# Altium PCB Brushless_driver_FOC_AbsoluteEncoder_V2.PcbDoc
Units mil, origin at the board's own origin, x right, y up, seen from the top; angles counter-clockwise.
Board outline 3750 x 1875 mil, 2 copper layers (Top Layer, Bottom Layer); 99 components, 79 nets, 371 pads, 291 vias.
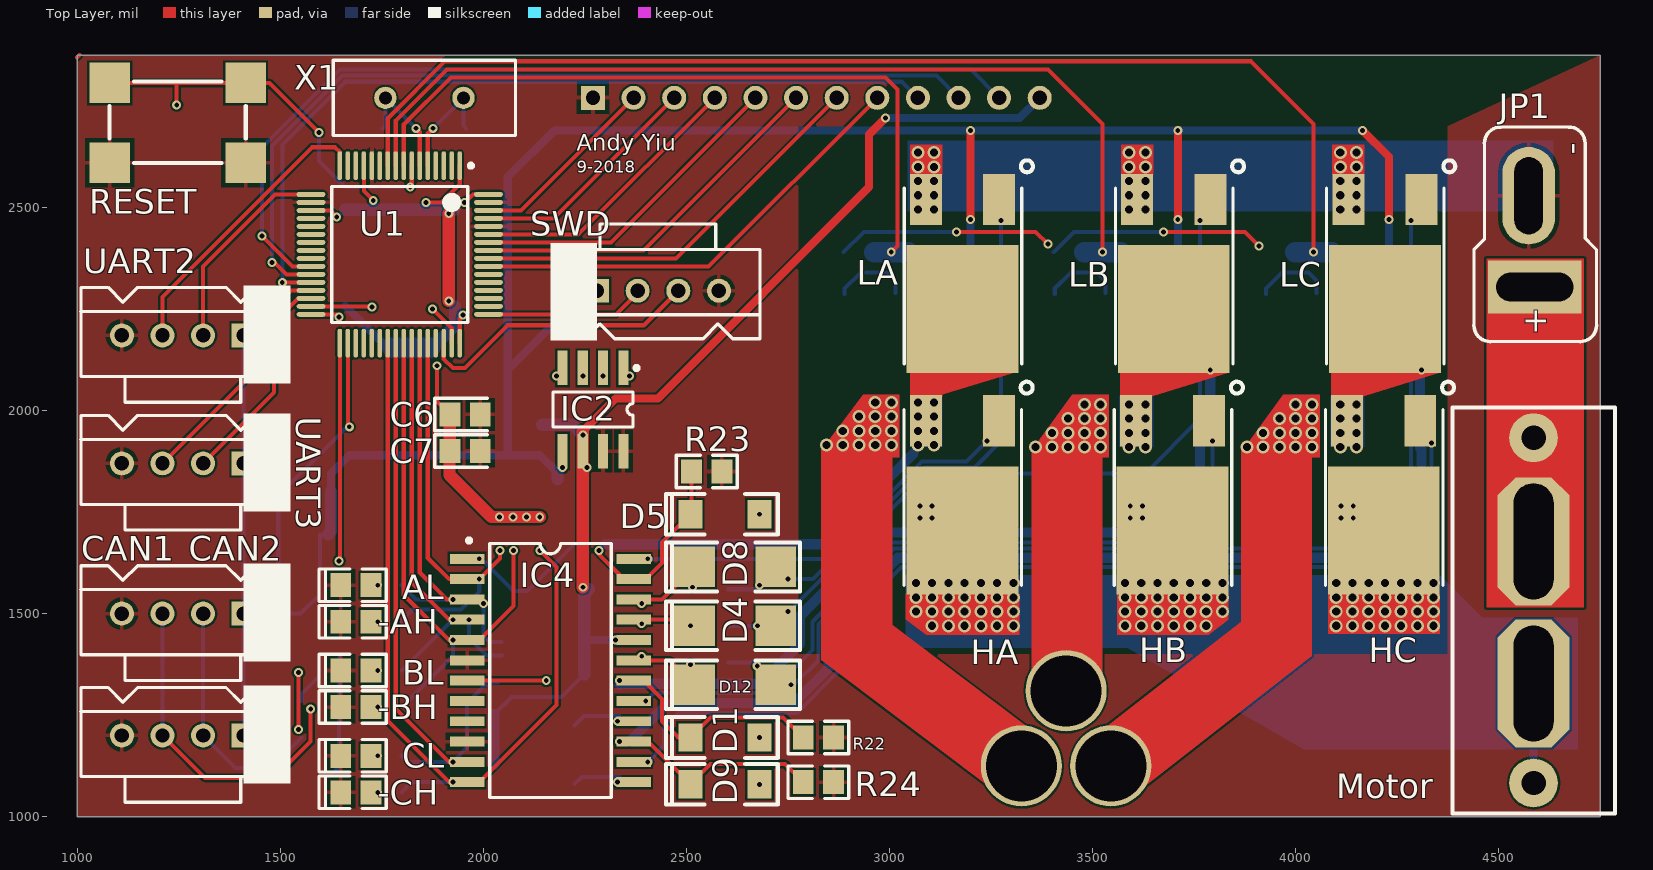
[diagram p0: Top Layer view]
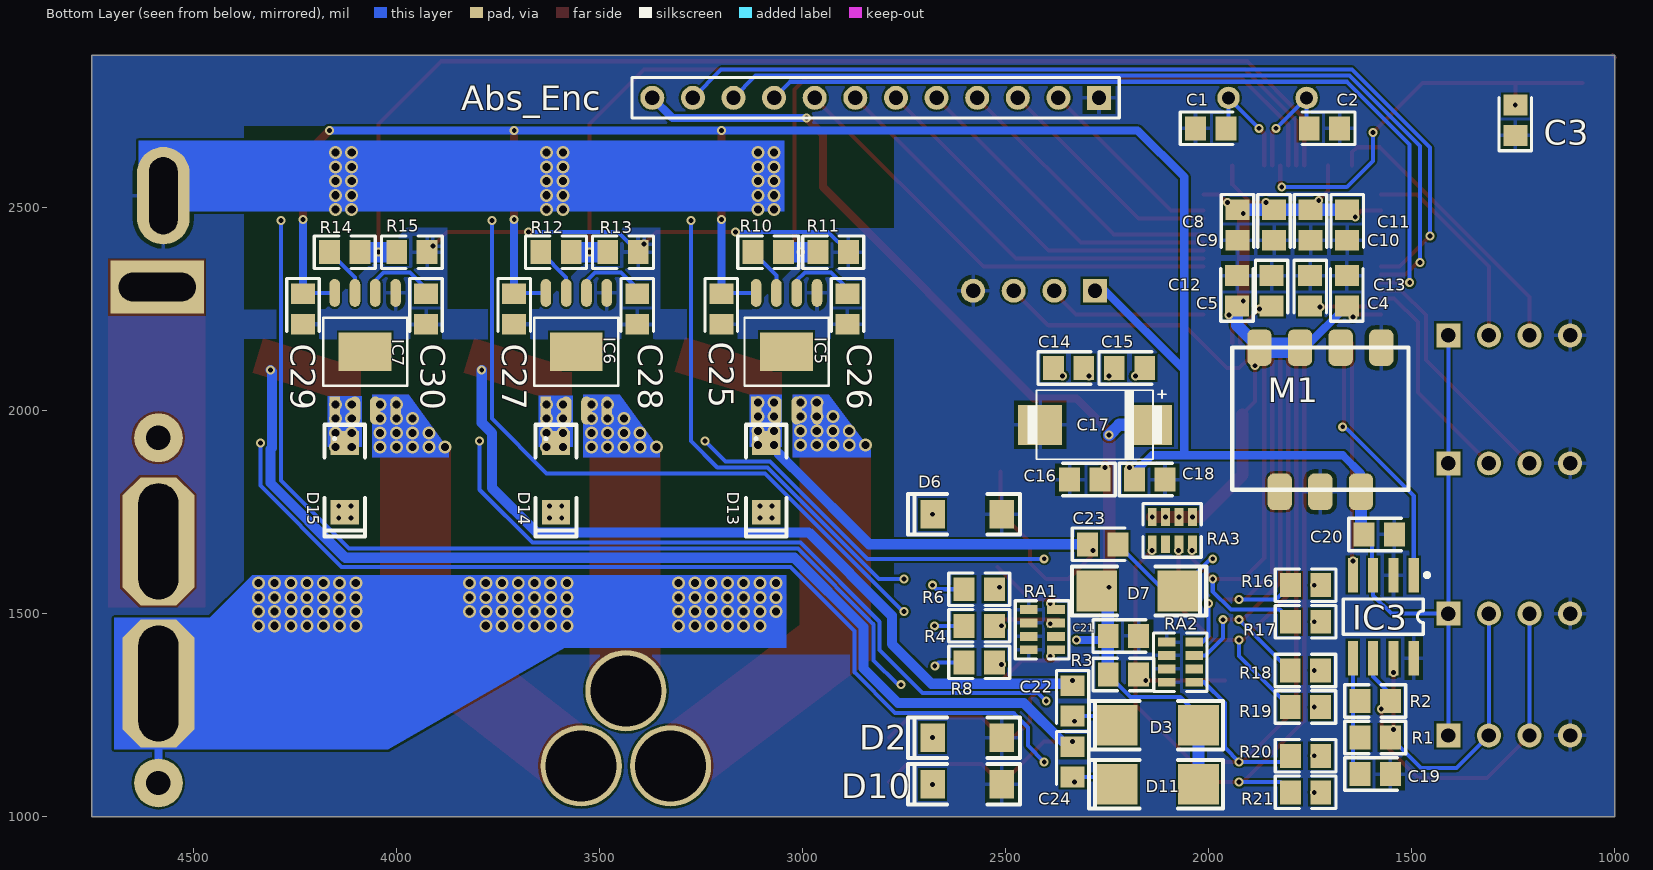
[diagram p1: Bottom Layer view, seen from below]

## Layer stack, top to bottom
Top Solder: solder mask 0.4, Solder Resist, Dk 3.5
Top Layer: signal copper 1.4
Dielectric 1: dielectric 12.6, FR-4, Dk 4.8
Bottom Layer: signal copper 1.4
Bottom Solder: solder mask 0.4, Solder Resist, Dk 3.5

## Board outline
1000,1000 1000,2875 4750,2875 4750,1000 1000,1000

## Design rules (kind name [scope] priority, off if disabled: settings)
AssemblyTestPointUsage [All] p1 off:
AssemblyTestpoint [All] p1 off: testpointundercomponent=TRUE minsize=40 maxsize=100 preferedsize=60 minholesize=0 maxholesize=40 preferedholesize=32 testpointgrid=1 usegrid=TRUE gridtolerance=0.01 allowsidetop=TRUE allowsidebottom=TRUE
Clearance [All] p1: gap=5
ComponentClearance [All] p1 off: gap=10 collisioncheckmode=3 verticalgap=10 showdistances=FALSE
DiffPairsRouting [All] p1 off: maxlimit=10 minlimit=10 mostfreqgap=10 toplayer_minwidth=15 toplayer_maxwidth=15 toplayer_prefwidth=15 bottomlayer_minwidth=15 bottomlayer_maxwidth=15 bottomlayer_prefwidth=15 maxuncoupledlength=500
FabricationTestPointUsage [All] p1 off: valid=0 allowmultiple=FALSE
FabricationTestpoint [All] p1 off: side=3 testpointundercomponent=TRUE minsize=40 maxsize=100 preferedsize=60 minholesize=0 maxholesize=40 preferedholesize=32 testpointgrid=1 allowsidetop=TRUE allowsidebottom=TRUE usegrid=TRUE gridtolerance=0.01
FanoutControl Fanout_BGA [IsBGA] p1 off: bgadir=Out bgaviamode=Centered fanoutstyle=Auto fanoutdirection=Alternating viagrid=1 // Fanout_BGA (Default Rule)
FanoutControl Fanout_LCC [IsLCC] p2 off: bgadir=Out bgaviamode=Centered fanoutstyle=Auto fanoutdirection=Alternating viagrid=1 // Fanout_LCC (Default Rule)
FanoutControl Fanout_SOIC [IsSOIC] p3 off: bgadir=Out bgaviamode=Centered fanoutstyle=Auto fanoutdirection=Alternating viagrid=1 // Fanout_SOIC (Default Rule)
FanoutControl Fanout_Small [(CompPinCount < 5)] p4 off: bgadir=Out bgaviamode=Centered fanoutstyle=Auto fanoutdirection=OutThenIn viagrid=1 // Fanout_Small (Default Rule)
FanoutControl Fanout_Default [All] p5 off: bgadir=Out bgaviamode=Centered fanoutstyle=Auto fanoutdirection=Alternating viagrid=1 // Fanout_Default (Default Rule)
Height [All] p1 off: minheight=0 maxheight=1000 prefheight=500
HoleSize [All] p1: absolutevalues=TRUE maxlimit=500 minlimit=1 maxpercent=80.000 minpercent=20.000
HoleToHoleClearance [All] p1 off: gap=10 allowstackedmicrovias=TRUE
LayerPairs [All] p1 off: enforce=TRUE
MinimumSolderMaskSliver [All] p1 off: minsoldermaskwidth=10
PasteMaskExpansion [All] p1 off: expansion=0
PolygonConnect [All] p1: connectstyle=Relief reliefconductorwidth=10 reliefentries=4 polygonreliefangle="90 Angle" airgapwidth=10
RoutingLayers [All] p1 off: top layer_v5=TRUE bottom layer_v5=TRUE
RoutingPriority [All] p1 off: routingpriority=0
RoutingTopology [All] p1 off: topology=Shortest
RoutingVias [All] p1 off: holewidth=28 width=50 viastyle="Through Hole" minholewidth=28 minwidth=50 maxholewidth=28 maxwidth=50
SilkToBoardRegionClearance [All] p1 off:
SilkToSilkClearance [All] p1 off: silktosilkclearance=10
SilkToSolderMaskClearance [IsPad] p1 off: minsilkscreentomaskgap=10 clearancetoexposedcopper=TRUE
SolderMaskExpansion [All] p1 off: expansion=4
UnpouredPolygon [All] p1: allowunpoured=FALSE
Width [All] p1: maxlimit=500 minlimit=10 preferedwidth=10
6 further rules are at their usual default settings.

## Components (designator, comment, footprint, x,y, rotation, side; value= is the part's Value field where it differs from the comment)
-AH "" D0805 1686.26,1480 r180 top
-BH "" D0805 1686.26,1270 r180 top
-CH "" D0805 1686.26,1060 r180 top
Abs_Enc "" HDR1X12 2270,2770 r0 bottom
AL "" D0805 1686.26,1570 r180 top
BL "" D0805 1686.26,1360 r180 top
C1 "20pF" CC2012-0805 1995,2695 r180 bottom
C2 "20pF" CC2012-0805 1715,2695 r0 bottom
C3 "100nF" CC2012-0805 1245,2715 r90 bottom
C4 "2.2uF" CC2012-0805 1750,2295 r270 bottom
C5 "2.2uF" CC2012-0805 1845,2295 r270 bottom
C6 "2.2uF" CC2012-0805 1955.26,1990.39 r0 top
C7 "100nF" CC2012-0805 1955.26,1900.39 r0 top
C8 "100nF" CC2012-0805 1929.05,2456.98 r270 bottom
C9 "100nF" CC2012-0805 1839.05,2456.98 r270 bottom
C10 "100nF" CC2012-0805 1749.05,2456.98 r270 bottom
C11 "100nF" CC2012-0805 1659.05,2456.98 r270 bottom
C12 "100nF" CC2012-0805 1930,2295 r90 bottom
C13 "100nF" CC2012-0805 1660,2295 r90 bottom
C14 "220nF" CC2012-0805 2345,2105 r180 bottom
C15 "220nF" CC2012-0805 2195,2105 r180 bottom
C16 "10uF" CC2012-0805 2305,1830 r0 bottom
C17 "100uF" EIA7343 2280,1965 r180 bottom
C18 "4.7uF" CC2012-0805 2145,1830 r180 bottom
C19 "39pF" CC2012-0805 1590,1105 r180 bottom
C20 "100nF" CC2012-0805 1580,1695 r180 bottom
C21 "1uF" CC2012-0805 2210,1445 r180 bottom
C22 "4.7uF" CC2012-0805 2335,1285 r270 bottom
C23 "4.7uF" CC2012-0805 2261,1670.79 r180 bottom
C24 "4.7uF" CC2012-0805 2335,1135 r270 bottom
C25 "100nF" CC2012-0805 3200,2250 r270 bottom
C26 "3.3nF" CC2012-0805 2889.4,2250 r270 bottom
C27 "100nF" CC2012-0805 3710,2250 r270 bottom
C28 "3.3nF" CC2012-0805 3407,2250 r270 bottom
C29 "100nF" CC2012-0805 4230,2250 r270 bottom
C30 "3.3nF" CC2012-0805 3927,2250 r270 bottom
CAN1 "" LOCKEDHDR-4 1260,1200 r180 top
CAN2 "" LOCKEDHDR-4 1260,1500 r180 top
CL "" D0805 1686.26,1150 r180 top
D1 "" SOD-80 2595,1195 r180 top
D2 "" SOD-80 2594.82,1194.53 r0 bottom
D3 "MBRS120" SMA 2025,1225 r0 bottom
D4 "MBRS120" SMA 2720,1470 r180 top
D5 "" SOD-80 2595,1745 r180 top
D6 "" SOD-80 2594.82,1744.53 r0 bottom
D7 "MBRS120" SMA 2276,1555.79 r180 bottom
D8 "MBRS120" SMA 2720,1615 r180 top
D9 "" SOD-80 2595,1080 r180 top
D10 "" SOD-80 2594.82,1079.53 r0 bottom
D11 "MBRS120" SMA 2025,1080 r0 bottom
D12 "MBRS120" SMA 2720,1325 r180 top
D13 "" SOD-80 3089.4,1835 r270 bottom
D14 "" SOD-80 3607,1835 r270 bottom
D15 "" SOD-80 4127,1835 r270 bottom
HA "" TO-252AA 3179.4,1840 r180 top
HB "" TO-252AA 3697,1840 r180 top
HC "" TO-252AA 4217,1840 r180 top
IC2 "MAX662A" SOP-8 2345,2105 r180 top
IC3 "TJA1050" SOP-8 1495,1595 r0 bottom
IC4 "HIP4086" SOP-24 2165,1360 r270 top
IC5 "ACS712ELCTR-30A-" SOIC-8 3039.4,2145 r90 bottom
IC6 "ACS712ELCTR-30A-" SOIC-8 3557,2145 r90 bottom
IC7 "ACS712ELCTR-30A-" SOIC-8 4077,2145 r90 bottom
JP1 "Battary power" T-CONNECTOR(M) 4589,2304 r90 top
LA "" TO-252AA 3180,2385 r180 top
LB "" TO-252AA 3700,2385 r180 top
LC "" TO-252AA 4220,2385 r180 top
M1 "5V_3.3V_regulator" 5V_to_3.3_regulator_module 1875,2155 r270 bottom
Motor "" "FUSE SOCKET" 4586,1933 r270 top
R1 "60" CR2012-0805 1590,1195 r0 bottom
R2 "60" CR2012-0805 1590,1285 r0 bottom
R3 "10k" CR2012-0805 2210,1350 r180 bottom
R4 "33" CR2012-0805 2565,1470 r180 bottom
R6 "33" CR2012-0805 2565,1560 r180 bottom
R8 "33" CR2012-0805 2565,1380 r180 bottom
R10 "2.2k" CR2012-0805 3084.4,2390 r180 bottom
R11 "6.2k" CR2012-0805 2924.4,2390 r0 bottom
R12 "2.2k" CR2012-0805 3607,2390 r180 bottom
R13 "6.2k" CR2012-0805 3442,2390 r0 bottom
R14 "2.2k" CR2012-0805 4127,2390 r180 bottom
R15 "6.2k" CR2012-0805 3962,2390 r0 bottom
R16 "330" CR2012-0805 1761.26,1570 r180 bottom
R17 "330" CR2012-0805 1761.26,1480 r180 bottom
R18 "330" CR2012-0805 1761.89,1360 r180 bottom
R19 "330" CR2012-0805 1761.89,1270 r180 bottom
R20 "330" CR2012-0805 1761.26,1150 r180 bottom
R21 "330" CR2012-0805 1761.26,1060 r180 bottom
R22 "4.7k" CR2012-0805 2825,1195 r0 top
R23 "4.7k" CR2012-0805 2550,1850 r0 top
R24 "4.7k" CR2012-0805 2825,1085 r0 top
RA1 "4X4.7k" ARC241-0603x4 2410,1460 r0 bottom
RA2 "4x1.5k" ARC241-0603x4 2070,1380 r0 bottom
RA3 "4x1.5k" ARC241-0603x4 2090,1705 r90 bottom
RESET "" "PUSH SWITCH" 1080,2610 r0 top
SWD "Header 4" LOCKEDHDR-4 2430,2295 r0 top
U1 "STM32F405RGT6" LQFP64 1795,2385 r270 top
UART2 "Header 4" LOCKEDHDR-4 1260,2185 r180 top
UART3 "Header 4" LOCKEDHDR-4 1260,1870 r180 top
X1 "8MHz" BCY-W2/E4.7 1855,2770 r0 top

## Footprints (in the part's own frame and the unit in brackets; to place one, negate y for a bottom-side part, rotate by r counter-clockwise, add the part's x,y. Pads: shape width x height; smd on the part's side, far side on the other; paste and mask are expansions set on the pad)
5V_to_3.3_regulator_module [mil]
  rrect50% 90x60 smd: 1(0,300) 2(0,200) 3(0,100) 4(0,0) 5(355,50) 6(355,150) 7(355,250)
  silkscreen extent 0,-67 350,367
ARC241-0603x4 [mm] "Chip Resistor Array; Body 1.6 x 0.8 x 4 mm (LxW typ)"
  rect 1.1x0.55 smd: 1(-0.864,1.245) 2(0.838,1.245) 3(-0.864,0.406) 4(0.838,0.406) 5(-0.864,-0.432) 6(0.838,-0.432) 7(-0.864,-1.27) 8(0.838,-1.27)
  silkscreen extent -1.68,-1.83 1.68,1.83, body extent -0.79,-1.6 0.81,1.6, height 0.55
BCY-W2/E4.7 [mm]
  round 1.4 hole 0.8: 1(-2.44,-0.002) 2(2.44,-0.002)
  silkscreen extent -5.7,-2.35 5.7,2.35, body extent -5.67,-2.32 5.68,2.33, height 3.6
CC2012-0805 [mm] "Chip Capacitor; Body 2.0 x 1.2 mm (LxW typ)"
  rect 1.3x1.5 smd: 1(-0.95,0) 2(0.95,0)
  silkscreen extent -1.91,-1.02 1.4,1.02, body extent -0.99,-0.64 1.01,0.61, height 0.58
CR2012-0805 [mm] "Chip Resistor; Body 2.0 x 1.3 mm (LxW typ)"
  rect 1.3x1.5 smd: 1(-0.95,0) 2(0.95,0)
  silkscreen extent -1.91,-1.02 1.91,1.02, body extent -0.98,-0.62 1.02,0.62, height 0.58
D0805 [mm]
  rect 1.3x1.5 smd: 1(-0.95,0) 2(0.95,0)
  silkscreen extent -1.91,-1.02 2.3,1.02, body extent -0.98,-0.49 1.02,0.51, height 0.48
EIA7343 [mm]
  rect 2.75x2.5 smd: 1(3.429,0) 2(-3.429,0)
  silkscreen extent -4.22,-2.21 4.44,2.21, body extent -3.65,-2.15 3.65,2.15, height 2.8
"FUSE SOCKET" [mil]
  round 120 hole 60: 1(0,0) 2(850,0)
  oct 314.96x177.17 hole 98.43 slot 285.43 at 0 deg: 1(255,0) 2(605,0)
  silkscreen extent -75,-200 925,200, body extent 120,-66 739,128, height 664
HDR1X12 [mm] "Connector; Header; 4 Position"
  rect 1.5x1.5 hole 0.9: 1(0,0)
  round 1.5 hole 0.9: 2(2.54,0) 3(5.08,0) 4(7.62,0) 5(10.16,0) 6(12.7,0) 7(15.24,0) 8(17.78,0) 9(20.32,0) 10(22.86,0) 11(25.4,0) 12(27.94,0)
  silkscreen extent -1.27,-1.27 29.21,1.27
LOCKEDHDR-4 [mm] "5-pin header with lock"
  rect 1.5x1.5 hole 0.9: 1(-3.81,0)
  round 1.5 hole 0.9: 2(-1.27,0) 3(1.27,0) 4(3.81,0)
  silkscreen extent -6.73,-3.13 6.37,4.18, body extent -6.3,-2.63 6.3,4.37, height 1.55
LQFP64 [mm]
  oval 1.8x0.3 smd: 1(-5.537,3.731) 2(-5.537,3.231) 3(-5.537,2.731) 4(-5.537,2.231) 5(-5.537,1.731) 6(-5.537,1.231) 7(-5.537,0.731) 8(-5.537,0.231) 9(-5.537,-0.269) 10(-5.537,-0.769) 11(-5.537,-1.269) 12(-5.537,-1.769) 13(-5.537,-2.269) 14(-5.537,-2.769) 15(-5.537,-3.269) 16(-5.537,-3.769) 33(5.563,-3.769) 34(5.563,-3.269) 35(5.563,-2.769) 36(5.563,-2.269) 37(5.563,-1.769) 38(5.563,-1.269) 39(5.563,-0.769) 40(5.563,-0.269) 41(5.563,0.231) 42(5.563,0.731) 43(5.563,1.231) 44(5.563,1.731) 45(5.563,2.231) 46(5.563,2.731) 47(5.563,3.231) 48(5.563,3.731)
  oval 0.3x1.8 smd: 17(-3.737,-5.569) 18(-3.237,-5.569) 19(-2.737,-5.569) 20(-2.237,-5.569) 21(-1.737,-5.569) 22(-1.237,-5.569) 23(-0.737,-5.569) 24(-0.237,-5.569) 25(0.263,-5.569) 26(0.763,-5.569) 27(1.263,-5.569) 28(1.763,-5.569) 29(2.263,-5.569) 30(2.763,-5.569) 31(3.263,-5.569) 32(3.763,-5.569) 49(3.763,5.531) 50(3.263,5.531) 51(2.763,5.531) 52(2.263,5.531) 53(1.763,5.531) 54(1.263,5.531) 55(0.763,5.531) 56(0.263,5.531) 57(-0.237,5.531) 58(-0.737,5.531) 59(-1.237,5.531) 60(-1.737,5.531) 61(-2.237,5.531) 62(-2.737,5.531) 63(-3.237,5.531) 64(-3.737,5.531)
  silkscreen extent -5.66,-4.27 4.26,4.56, body extent -6.01,-6 5.99,6, height 1.7
"PUSH SWITCH" [mm]
  rect 2.54x2.54 smd: 1(0,0) 1(8.5,0) 2(0,5) 2(8.5,5)
  silkscreen extent 0,0 8.51,5.08
SMA [mil]
  rect 100x100 smd: 1(0,0) 2(200,0)
  silkscreen extent -60,-60 270,60
SOD-80 [mil]
  rect 60x70 smd: 1(-85,0) 2(85,0)
  silkscreen extent -130,-50 145,50, body extent -69,-29 69,30, height 60
SOIC-8 [mil]
  rect 69x26 smd paste+0 mask+0: 1(-144.68,75)
  oval 69x26 smd paste+0 mask+0: 2(-144.68,25) 3(-144.68,-25) 4(-144.68,-75) 5(144.68,-75) 6(144.68,-25) 7(144.68,25) 8(144.68,75)
  rect 95x130 smd paste-64.5 mask+0: 9(0,0)
  silkscreen extent -217,-104 84,104, body extent -165,-99 165,99, height 69
SOP-8 [mil]
  rect 25x85 smd: 1(0,0) 2(50,0) 3(100,0) 4(150,0) 5(150,204.72) 6(100,204.72) 7(50,204.72) 8(0,204.72)
  silkscreen extent -37,-5 173,146, body extent -22,-13 171,223, height 67
SOP-24 [mil] "Plastic Small Outline; 24 Leads; Body Width 7.5 mm"
  rect 24.5x85 smd: 1(-275,-205) 2(-225,-205) 3(-175,-205) 4(-125,-205) 5(-75,-205) 6(-25,-205) 7(25,-205) 8(75,-205) 9(125,-205) 10(175,-205) 11(225,-205) 12(275,-205) 13(275,205) 14(225,205) 15(175,205) 16(125,205) 17(75,205) 18(25,205) 19(-25,205) 20(-75,205) 21(-125,205) 22(-175,205) 23(-225,205) 24(-275,205)
  silkscreen extent -325,-205 312,150
T-CONNECTOR(M) [mil]
  rect 130x230 hole 70 slot 190 at 90 deg: 1(0,0)
  oval 240x130 hole 70 slot 190 at 0 deg: 2(225,15)
  silkscreen extent -134,-152 394,150, body extent -134,-155 398,152, height 598
TO-252AA [mm] "D-PAK/TO-252-AA; 3 Leads (1 Cropped); Body 10.4 (inc. leads) x 6.7 mm (LxW max)"
  rect 2x3.2 smd: 1(-2.285,-3.425) 3(2.285,-3.425)
  rect 7x8 smd: 4(0,3.425)
  silkscreen extent -4.4,-5.87 3.65,6.88

## Part data
-AH -BH -CH AL BL CL: library part LED, "Typical RED GaAs LED"
Abs_Enc: library part "Header 12", "Header, 12-Pin"
C1 C2 C3 C4 C5 C6 C7 C8 C9 C10 C11 C12 C13 C14 C15 C16 C18 C19 C20 C21 C22 C23 C24 C25 C26 C27 C28 C29 C30: library part "Cap Semi", "Capacitor (Semiconductor SIM Model)"
C17: library part "Cap Pol SMD", "Polarized Capacitor (Axial)"
CAN1 CAN2: library part "Header 4", "Header, 4-Pin"
D1 D2 D5 D6 D9 D10 D13 D14 D15: library part "D General", "General Purpose Diode"
D3 D4 D7 D8 D11 D12: library part "D Schottky", "Schottky Diode"
HA HB HC LA LB LC: library part IRLR3705, "HEXFET N-Channel Power MOSFET"
IC2 IC3: "5V to 12V Charge Pump"
IC4: "80V, 500mA, 3-Phase MOSFET Driver80V, 500mA, 3-Phase MOSFET Driver"
IC5 IC6 IC7: "Imported"
JP1: library part "Header 2", "Header, 2-Pin"
Motor: library part Fuse, "Fuse"
R1 R2 R3 R4 R6 R8 R10 R11 R12 R13 R14 R15 R16 R17 R18 R19 R20 R21 R22 R23 R24: library part "Res Semi", "Semiconductor Resistor"
RA1 RA2 RA3: library part "Res Array", "4x Resistor Array"
RESET: library part SW-SPST, "Single-Pole, Single-Throw Switch"
SWD UART2 UART3: "Header, 4-Pin"
X1: library part XTAL, "Crystal Oscillator"

## Free pads (board coordinates)
  round 200 hole 175: 1(3325,1125) 1(3435,1310) 1(3545,1125)

## Via types
v1: diameter 32, hole 20, Top Layer to Bottom Layer, 178 vias
v2: diameter 22, hole 12, Top Layer to Bottom Layer, 113 vias

## Nets (pads, with @x,y where several pads share a name; then routed paths per layer and width w, separated by ;. In a path a pad name is that pad's centre, name@x,y a point inside that pad or via, vN(x,y) a via of type N, cw(c..) or ccw(c..) an arc to the next point about the centre after c; other vN are vias at no path point)
3.3V: C6.1 C7.1 C8.1 C9.1 C10.1 C11.1 C12.1 C13.1 M1.3 M1.4 RA3.2 RA3.4 RA3.6 RA3.8 U1.1 U1.13 U1.19 U1.32 U1.48 U1.64 | length 2030.6
  Top Layer w10: U1.32 1638.15,2236.85 v2(1645,2230) ; U1.19 1623.27,2492.76 v2(1639.05,2476.98) v2@1636.8,2474.74 ; U1.13 1705.67,2540.36 v2(1729.05,2516.98) ; v2(1859.05,2511.98) 1896.98,2511.98 1941.89,2556.89 U1.1 ; v2(1886.26,2110.39) 1886.26,2021.99 C6.1 ; U1.48 1941.89,2226.89 v2(1950,2235) ; v2@1956.17,2514.11 v2(1954.05,2511.98) 1974.19,2532.13 U1.64
  Top Layer w30: v2(1915,2270) v2(1915,2485) ; C6.1@1916.6,1990 1916.6,1841.4 2020,1738 v2(2040,1738) v2(2073,1738) v2(2106,1738) v2(2139,1738) ; C7.1 C6.1
  Bottom Layer w10: M1.3@1762.6,2155 M1.3
  Bottom Layer w20: C13.1 M1.3@1762.6,2155
  Bottom Layer w30: C11.1 C10.1 C9.1 C8.1 ; M1.4 1930,2210 C12.1
  Bottom Layer w50: M1.3 M1.4@1870,2155
5V: C18.1 C20.1 C25.1 C27.1 C29.1 CAN1.1 CAN2.1 IC2.5 IC3.3 IC5.8 IC6.8 IC7.8 M1.7 SWD.1 UART2.1 UART3.1 | length 6697
  Top Layer w20: v2(3200,2470) v2(3200,2690) ; v2(3710,2470) v2(3710,2690) ; v2(4165,2690) 4230,2625 v2(4230,2470)
  Bottom Layer w10: UART2.1@1405,2175 1410,2170 UART3.1 CAN2.1 ; CAN1.1 CAN2.1 ; C20.1@1597.4,1695 1597.4,1597.4 IC3.3 1595,1545 1550,1500 CAN2.1 ; IC5.8 3187.12,2289.68 C25.1@3189.4,2287.4 ; IC6.8 3704.72,2289.68 C27.1@3707,2287.4 ; IC7.8 4224.72,2289.68 C29.1@4227,2287.4
  Bottom Layer w20: M1.7 1625,1845 1670,1890 2060,1890 ; C18.1@2182.4,1847.6 2140,1890 2060,1890 ; SWD.1 2255,2295 2060,2100 ; C25.1 v2(3200,2470) ; C27.1 v2(3710,2470) ; v2(4165,2690) 2175,2690 2060,2575 2060,2100 ; C29.1 v2(4230,2470) ; 2060,1890 2060,2100
  Bottom Layer w30: C20.1 1625,1702.6 M1.7 ; C18.1 C18.1@2182.4,1847.6
  other v2: 2195,1860
12/24V_IN: JP1.1 Motor.1
12/24V_MOTOR: D13.2 D14.2 D15.2 HA.4 HB.4 HC.4 Motor.2 | length 245
  Bottom Layer w20: Motor.2@4586,1083 Motor.2@4586,1328
  other v1: 3105,1470 3145,1470 3185,1470 3225,1470 3265,1470 3305,1470 3580,1470 3620,1470 3660,1470 3700,1470 3740,1470 3780,1470 4100,1470 4140,1470 4180,1470 4220,1470 4260,1470 4300,1470 4340,1470 3065,1505 3105,1505 3145,1505 3185,1505 3225,1505 3265,1505 3305,1505 3580,1505 3620,1505 3660,1505 3700,1505 3740,1505 3780,1505 3820,1505 4100,1505 4140,1505 4180,1505 4220,1505 4260,1505 4300,1505 4340,1505 3065,1540 3105,1540 3145,1540 3185,1540 3225,1540 3265,1540 3305,1540 3580,1540 3620,1540 3660,1540 3700,1540 3740,1540 3780,1540 3820,1540 4100,1540 4140,1540 4180,1540 4220,1540 4260,1540 4300,1540 4340,1540 3065,1575 3105,1575 3145,1575 3185,1575 3225,1575 3265,1575 3305,1575 3580,1575 3620,1575 3660,1575 3700,1575 3740,1575 3780,1575 3820,1575 4100,1575 4140,1575 4180,1575 4220,1575 4260,1575 4300,1575 4340,1575
  other v2: 3075,1735 3105,1735 3593,1735 3623,1735 4112,1735 4142,1735 3075,1765 3105,1765 3593,1765 3623,1765 4112,1765 4142,1765
12V: Abs_Enc.12 C16.1 C17.1 C21.1 D3.1 D7.1 D11.1 IC2.6 IC4.20 R3.1 | length 2715
  Top Layer w20: v2@2245,1950 2325,2030 2430,2030 2950,2550 2950,2680 v2(2990,2720)
  Top Layer w30: v2(2245,1565) IC2.6 v2(2245,1940) v2@2245,1950
  Bottom Layer w10: D3.1@2025,1250 2070,1295 2192.4,1295 R3.1
  Bottom Layer w20: C21.1 2248.4,1444 2257.4,1435 v2(2325,1435) ; v2(2990,2720) 3320,2720 Abs_Enc.12
  Bottom Layer w30: 2025,1130 D3.1@2025,1250 ; C17.1 2220,1965 v2(2245,1940) ; R3.1@2248.4,1350.79 2248.4,1444 2248.4,1542.36 D7.1@2259.63,1560.91
  other v2: 2255,1860
-INHA: IC4.2 R17.1 RA3.7 U1.44 | length 1023.1
  Top Layer w10: U1.44 1863.15,1636.85 1915,1585 IC4.2 v2(1990,1585) 2041,1636 v2(2041,1655)
  Bottom Layer w10: R17.1 1798.66,1483.66 1825,1510 1945,1510 1990,1555 v2(1990,1585)
-INHB: IC4.5 R19.1 RA3.5 U1.41 | length 1323.8
  Top Layer w10: U1.41 1804.09,1545.91 1915,1435 v2(1925,1435) IC4.5 1990,1435 2074,1519 v2(2074,1655)
  Bottom Layer w10: R19.1 1925,1395.71 v2(1925,1435)
-INHC: IC4.12 R21.1 RA3.1 U1.39 | length 2020.2
  Top Layer w10: U1.39 1764.72,1235.28 1915,1085 v2(1925,1085) IC4.12 1990,1085 2180,1275 2180,1614.95 v2(2139.97,1654.97)
  Bottom Layer w10: R21.1 1823.66,1085 v2(1925,1085)
ABSOLUTEENCODER_0: Abs_Enc.11 U1.26 | length 2292.6
  Top Layer w10: v2(1455,2430) 1530.04,2354.96 U1.26
  Bottom Layer w10: v2(1455,2430) 1455,2647.43 1647.1,2839.53 3200.47,2839.53 Abs_Enc.11
ABSOLUTEENCODER_1: Abs_Enc.10 U1.27 | length 2186.1
  Top Layer w10: v2(1480,2365) 1480,2370.29 1515.01,2335.28 U1.27
  Bottom Layer w10: v2(1480,2365) 1480,2651.21 1653.31,2824.53 3115.47,2824.53 Abs_Enc.10
ABSOLUTEENCODER_2: Abs_Enc.9 U1.28 | length 2055.5
  Top Layer w10: v2(1505,2315.59) U1.28
  Bottom Layer w10: v2(1505,2315.59) 1505,2655 1659.53,2809.53 3030.47,2809.53 Abs_Enc.9
ABSOLUTEENCODER_3: Abs_Enc.8 U1.55 | length 1129.2
  Top Layer w10: U1.55 2554.96,2354.96 Abs_Enc.8
ABSOLUTEENCODER_4: Abs_Enc.7 U1.56 | length 1021
  Top Layer w10: U1.56 2474.65,2374.65 Abs_Enc.7
ABSOLUTEENCODER_5: Abs_Enc.6 U1.57 | length 912.9
  Top Layer w10: U1.57 2394.33,2394.33 Abs_Enc.6
ABSOLUTEENCODER_6: Abs_Enc.5 U1.58 | length 804.7
  Top Layer w10: U1.58 2314.02,2414.02 Abs_Enc.5
ABSOLUTEENCODER_7: Abs_Enc.4 U1.59 | length 696.5
  Top Layer w10: U1.59 2233.7,2433.7 Abs_Enc.4
ABSOLUTEENCODER_8: Abs_Enc.3 U1.61 | length 580.2
  Top Layer w10: U1.61 2173.07,2473.07 Abs_Enc.3
ABSOLUTEENCODER_9: Abs_Enc.2 U1.62 | length 472.1
  Top Layer w10: U1.62 2092.76,2492.76 Abs_Enc.2
AHG: HA.1 IC4.24 | length 955.1
  Bottom Layer w10: v2(2405,1635) 2840,1635 3080,1875 3190,1875 v2(3240,1925)
AHS: C23.1 D5.2 D13.1 HA.3 IC4.23 IC5.1 IC5.2 LA.4 R23.1 | length 1371.5
  Top Layer w10: v2@2285,1645.79 2345.79,1585 IC4.23 2400,1585 2440,1625 2440,1675 D5.2 2512.6,1747.6 R23.1
  Bottom Layer w10: D13.1@3059.57,1894.57 v1@3059.57,1960.43
  Bottom Layer w25: C23.1 2835.59,1670.79 3022.3,1857.5 3022.5,1857.5 D13.1@3059.57,1894.57
  other v1: 3070,1915 3110,1915 3070,1950 3110,1950 3070,1985 3110,1985 3070,2020 3110,2020
  other v2: 2285,1655
ALG: D8.1 LA.1 R6.1 | length 1290.6
  Bottom Layer w10: R6.1 2670,1560 v2(2680,1570) ; v2(2750,1585) 2811.21,1585 3086.21,1860 3210,1860 3275,1925 v2(3275,2468)
ALG_PD: D8.2 IC4.22 R6.2 RA1.7 | length 183.1
  Top Layer w10: IC4.22 2440,1535 D8.2
  other v2: 2390,1525 2515,1565
BHG: HB.1 IC4.17 | length 1771.4
  Bottom Layer w10: v2(2400,1285) 2420,1305 2705,1305 2810,1410 2810,1480 3005,1675 3665,1675 3795,1805 v2(3795,1925)
BHS: C22.1 D1.2 D14.1 HB.3 IC4.18 IC6.1 IC6.2 LB.4 R22.1 | length 2556.1
  Top Layer w10: v2(2335,1335) 2395,1335 2440,1290 2440,1235 2480,1195 D1.2 2559.53,1244.53 2738.07,1244.53 R22.1
  Bottom Layer w25: C22.1@2335,1325 2337.5,1327.5 2682.5,1327.5 2780,1425 2780,1495 2985,1700 3655,1700 3765,1810 3765,1945 3790,1970 v2(3790,2100)
  other v1: 3590,1910 3630,1910 3590,1945 3630,1945 3590,1980 3630,1980 3590,2015 3630,2015
BLG: D4.1 LB.1 R4.1 | length 1772.3
  Bottom Layer w10: R4.1 v2(2675,1470) ; v2(2750,1505) 2752.43,1505 3092.43,1845 3630,1845 3765,1980 v2(3765,2468)
BLG_PD: D4.2 IC4.21 R4.2 RA1.5 | length 156.2
  Top Layer w10: IC4.21 2505,1485 D4.2
  other v2: 2510,1470 2390,1475
CAN1H: CAN1.2 CAN2.2 IC3.7 R1.1 | length 746.8
  Top Layer w10: v2(1545,1215) v2(1545,1355)
  Bottom Layer w10: CAN2.2 CAN1.2 1390,1120 1477.6,1120 R1.1
CAN1L: CAN1.3 CAN2.3 IC3.6 R2.1 | length 948.6
  Top Layer w10: CAN1.3 1315,1095 1485,1095 1575,1185 v2(1575,1265)
  Bottom Layer w10: CAN1.3 CAN2.3 ; R2.1 1552.6,1302.6 1595,1345 IC3.6
CAN2_RX: IC3.4 U1.33 | length 527.6
  Top Layer w10: v2@1646.61,1638.39 U1.33
  other v2: 1645,1630
CAN2_TX: IC3.1 U1.34 | length 635.9
  Top Layer w10: U1.34 1666.3,1963.7 v2(1670,1960)
  Bottom Layer w10: IC3.1 1495,1790 1660,1955
CHG: HC.1 IC4.14 | length 2402.8
  Bottom Layer w10: v2(2405,1135) 2445,1175 2445,1220 2480,1255 2771.82,1255 2872.5,1355.68 2872.5,1457.65 3029.85,1615 4135,1615 4335,1815 v2(4335,1920)
CHS: C24.1 D9.2 D15.1 HC.3 IC4.15 IC7.1 IC7.2 LC.4 R24.1 | length 3114.6
  Top Layer w10: v2(2335,1185) IC4.15 2405,1185 D9.2 2559.53,1129.53 2743.07,1129.53 R24.1
  Bottom Layer w10: v2(2335,1185) C24.1@2360,1185
  Bottom Layer w25: C24.1@2360,1185 2455,1280 2765,1280 2850,1365 2850,1466.97 3020.53,1637.5 4125.68,1637.5 4310,1821.82 4310,1904.69 4306.5,1908.19 4306.5,2096.5 v2(4310,2100)
  other v1: 4110,1910 4150,1910 4110,1945 4150,1945 4110,1980 4150,1980 4110,2015 4150,2015
CLG: D12.1 LC.1 R8.1 | length 2503
  Bottom Layer w10: R8.1 2665,1380 v2(2674.39,1370.61) ; v2(2757.5,1325) 2765,1325 2825,1385 2825,1473.79 3011.21,1660 4116.36,1660 4284,1827.64 v2(4284,2468)
CLG_PD: D12.2 IC4.19 R8.2 RA1.1 | length 174.9
  Top Layer w10: IC4.19 2460,1385 D12.2
  other v2: 2510,1375 2390,1395
CURRENTSENSING_A: R10.2 R11.2 U1.8 | length 1869.1
  Top Layer w10: U1.8 1804.09,2704.09 1920,2820 2990,2820 3020,2790 3020,2405.6 v2(3004.4,2390)
  Bottom Layer w50: R11.2 v2(3004.4,2390) R10.2
CURRENTSENSING_B: R12.2 R13.2 U1.9 | length 2364.9
  Top Layer w10: U1.9 1784.41,2714.41 1910,2840 3390,2840 3524.5,2705.5 v2(3524.5,2390)
  Bottom Layer w50: R13.2 v2(3524.5,2390) R12.2
CURRENTSENSING_C: R14.2 R15.2 U1.10 | length 2924.3
  Top Layer w10: U1.10 1764.72,2719.72 1905,2860 3890,2860 4044.5,2705.5 v2(4044.5,2390)
  Bottom Layer w50: R15.2 v2(4044.5,2390) R14.2
GND: -AH.2 -BH.2 -CH.2 Abs_Enc.1 AL.2 BL.2 C1.1 C2.1 C3.1 C4.1 C5.1 C6.2 C7.2 C8.2 C9.2 C10.2 C11.2 C12.2 C13.2 C16.2 C17.2 C18.2 C19.2 C20.2 C21.2 C25.2 C26.2 C27.2 C28.2 C29.2 C30.2 CAN1.4 CAN2.4 CL.2 D2.1 D6.1 D10.1 IC2.7 IC2.8 IC3.2 IC3.8 IC4.6 IC4.10 IC5.5 IC6.5 IC7.5 JP1.2 LA.3 LB.3 LC.3 M1.1 M1.6 R11.1 R13.1 R15.1 R22.2 R23.2 R24.2 RA1.2 RA1.4 RA1.6 RA1.8 RA2.2 RA2.4 RA2.6 RA2.8 RESET.1 SWD.4 U1.12 U1.18 U1.60 U1.63 UART2.4 UART3.4 | length 1076.7
  Top Layer w10: v2(3165,2440) 3360,2440 v2(3390,2410) ; v2(3675,2440) 3875,2440 v2(3910,2405)
  Bottom Layer w10: R11.1 2937,2440 v2(3165,2440) ; R13.1 3454.6,2440 v2(3675,2440)
  other v1: 3070,2495 3110,2495 3590,2495 3630,2495 4110,2495 4150,2495 3070,2530 3110,2530 3590,2530 3630,2530 4110,2530 4150,2530 3070,2565 3110,2565 3590,2565 3630,2565 4110,2565 4150,2565 3070,2600 3110,2600 3590,2600 3630,2600 4110,2600 4150,2600 3070,2635 3110,2635 3590,2635 3630,2635 4110,2635 4150,2635
INLA: IC4.3 R16.1 RA2.7 U1.43 | length 980.6
  Top Layer w10: U1.43 1843.46,1601.54 1910,1535 v2(1925,1535) IC4.3
  Bottom Layer w10: R16.1 1833.66,1535 v2(1925,1535) ; v2(2000,1525) 2000,1445 2015,1430 RA2.7@2045,1430
INLB: IC4.4 R18.1 RA2.5 U1.42 | length 1085.1
  Top Layer w10: U1.42 1823.78,1576.22 1915,1485 v2(1925,1485) IC4.4
  Bottom Layer w10: R18.1 1800,1360 v2(1925,1485) ; v2(1965,1485) 1965,1440 2008,1397 RA2.5@2046,1397
INLC: IC4.11 R20.1 RA2.1 U1.40 | length 1519.3
  Top Layer w10: U1.40 1784.41,1265.59 1915,1135 v2(1925,1135) IC4.11
  Bottom Layer w10: R20.1 1813.66,1135 v2(1925,1135) 1960,1170 1960,1280 2011,1331 RA2.1
Net-AH_1: -AH.1 R17.2
  other v2: 1740,1480
Net-BH_1: -BH.1 R19.2
  other v2: 1740,1270
Net-CH_1: -CH.1 R21.2
  other v2: 1740,1060
NetAL_1: AL.1 R16.2
  other v2: 1740,1570
NetBL_1: BL.1 R18.2
  other v2: 1740,1360
NetC1_2: C1.2 U1.5 X1.2 | length 281
  Top Layer w10: U1.5 1863.15,2682.02 v2(1876.13,2695)
  Bottom Layer w10: v2(1876.13,2695) X1.2 1951.06,2701.54 C1.2
NetC2_2: C2.2 U1.6 X1.1 | length 279.6
  Top Layer w10: v2(1833.87,2695) 1843.46,2685.41 U1.6
  Bottom Layer w10: C2.2 1758.94,2701.53 X1.1 v2(1833.87,2695)
NetC3_2: C3.2 RESET.2 U1.7 | length 996.4
  Top Layer w10: RESET.2@1080,2806.85 1245,2806.85 ; v2(1245,2752.4) 1245,2806.85 ; v2(1595,2685) 1473.15,2806.85 1245,2806.85 ; v2(1820,2550) 1823.78,2553.78 U1.7
  Bottom Layer w10: v2(1595,2685) 1595,2615 1660,2550 v2(1820,2550)
NetC4_2: C4.2 U1.31 | length 150.6
  Top Layer w10: U1.31 1724.51,2256.54 v2(1725.79,2255.26)
NetC5_2: C5.2 U1.47 | length 103.6
  Top Layer w10: v2(1875,2250) 1922.2,2202.8 U1.47
NetC14_1: C14.1 IC2.1
  other v2: 2360,2085
NetC14_2: C14.2 IC2.2
  other v2: 2295,2085
NetC15_1: C15.1 IC2.3
  other v2: 2245,2085
NetC15_2: C15.2 IC2.4
  other v2: 2180,2085
NetC19_1: C19.1 IC3.5 R1.2 R2.2 | length 292.6
  Bottom Layer w10: C19.1 1645,1122.6 IC3.5
NetC22_2: C22.2 D3.2 IC4.16 | length 119.4
  Bottom Layer w10: D3.2 2247.6,1247.6 C22.2
  other v2: 2330,1235
NetC23_2: C23.2 D7.2 IC4.1 | length 312.6
  Bottom Layer w10: v2@1992.5,1637.5 2074.21,1555.79 D7.2 2108.6,1555.79 C23.2
  other v2: 1990,1635
NetC24_2: C24.2 D11.2 IC4.13 | length 117.3
  Bottom Layer w10: D11.2 2242.6,1097.6 C24.2
  other v2: 2330,1085
NetC26_1: C26.1 IC5.6 | length 192.8
  Bottom Layer w10: C26.1 2889.4,2300 2929.4,2340 2994.4,2340 3014.4,2320 IC5.6
NetC28_1: C28.1 IC6.6 | length 192.3
  Bottom Layer w10: C28.1 3407,2300 3447,2340 3511.18,2340 3532,2319.18 IC6.6
NetC30_1: C30.1 IC7.6 | length 192.8
  Bottom Layer w10: C30.1 3927,2300 3967,2340 4032,2340 4052,2320 IC7.6
NetCL_1: CL.1 R20.2
  other v2: 1740,1150
NetD1_1: D1.1 D2.2
  other v2: 2679.82,1194.53
NetD5_1: D5.1 D6.2
  other v2: 2679.82,1744.53
NetD9_1: D9.1 D10.2
  other v2: 2679.82,1079.53
NetIC4_7: IC4.7 R3.2 | length 195
  Top Layer w10: IC4.7 v2(2155,1335)
NetIC5_7: IC5.7 R10.1 | length 124.1
  Bottom Layer w10: IC5.7 3064.4,2332.6 R10.1
NetIC6_7: IC6.7 R12.1 | length 126.2
  Bottom Layer w10: IC6.7 3582,2327.6 R12.1
NetIC7_7: IC7.7 R14.1 | length 126.2
  Bottom Layer w10: IC7.7 4102,2327.6 R14.1
PHASEA: IC5.3 IC5.4 pad.1@3325,1125
  other v1: 2845,1915 2885,1915 2925,1915 2965,1915 3005,1915 2885,1950 2925,1950 2965,1950 3005,1950 2925,1985 2965,1985 3005,1985 2965,2020 3005,2020
PHASEB: IC6.3 IC6.4 pad.1@3435,1310
  other v1: 3360,1910 3400,1910 3440,1910 3480,1910 3520,1910 3400,1945 3440,1945 3480,1945 3520,1945 3440,1980 3480,1980 3520,1980 3480,2015 3520,2015
PHASEC: IC7.3 IC7.4 pad.1@3545,1125
  other v1: 3880,1910 3920,1910 3960,1910 4000,1910 4040,1910 3920,1945 3960,1945 4000,1945 4040,1945 3960,1980 4000,1980 4040,1980 4000,2015 4040,2015
SWCLK: SWD.2 U1.49 | length 392.8
  Top Layer w10: U1.49 2326.85,2236.85 SWD.2@2382.5,2292.5
SWDIO: SWD.3 U1.46 | length 704
  Top Layer w10: U1.46 1902.52,2127.48 1925,2105 1955,2105 2060,2210 2395,2210 SWD.3
UART2_RX: U1.17 UART2.2 | length 519.1
  Top Layer w10: UART2.2@1310,2175 1310,2355 1487.13,2532.13 U1.17
UART2_TX: U1.16 UART2.3 | length 732.6
  Top Layer w10: UART2.3@1210,2175 1210,2280 1578.27,2648.27 1635,2648.27 1646.61,2636.65 U1.16
UART3_RX: U1.30 UART3.2 | length 535.2
  Top Layer w10: UART3.2 1485,2045 1485,2217.81 1543.41,2276.22 U1.30
UART3_TX: U1.29 UART3.3 | length 606.6
  Top Layer w10: UART3.3 1465,2125 1465,2235 1525.91,2295.91 U1.29
pads on no net: IC4.8 IC4.9 IC5.9 IC6.9 IC7.9 M1.2 M1.5 RA1.3 RA2.3 RA3.3 U1.2 U1.3 U1.4 U1.11 U1.14 U1.15 U1.20 U1.21 U1.22 U1.23 U1.24 U1.25 U1.35 U1.36 U1.37 U1.38 U1.45 U1.50 U1.51 U1.52 U1.53 U1.54
copper on no net: | length 7.9
  Top Layer w10: 1000,2869.42 1005.58,2875

## Polygon pours and split planes (outlines as drawn)
GND on Top Layer "Top Layer-No Net" (solid, remove dead copper, pour order 38): 4750,2875 4750,1000 1000,1000 1000,2875 4750,2875 4375,2700 4327.51,2700 2775,2700 2775,1400 4375,1400 4375,2500 4375,2700
GND on Bottom Layer "Top Layer-No Net" (solid, remove dead copper, pour order 44): 4750,2875 1000,2875 1000,1000 4750,1000 4750,2875 4375,2700 4327.51,2700 2775,2700 2775,1400 4375,1400 4375,2175 2775,2175 2775,2450 2925,2450 3125,2250 3350,2250 3350,2450 3450,2450 3650,2250 3875,2250 3875,2450 3975,2450 4175,2250 4375,2250 4375,2700

## Other copper
Top Layer:
  region net PHASEA: 2905.47,1848.63 3008.15,1984.88 2935,2040 2832.33,1903.75
  region net PHASEA: 3275.82,1050.56 3381.14,1190.32 2937.32,1524.76 2832,1385
  region net PHASEC: 4040,1395 3932.26,1532.9 3492.7,1189.48 3600.44,1051.58
  rectangle net PHASEA: 2832,1384.74 3007,1903.74
  rectangle net PHASEB: 3350,1310 3525,1904
  rectangle net PHASEC: 3865,1395 4040,1904
  rectangle net PHASEA: 2935,1885 3025,2040
  region net AHS: 3095.05,2027.75 3315,2095 3288.7,2181.04 3068.75,2113.79
  rectangle net AHS: 3050,2035 3130,2095
  rectangle net PHASEB: 3450,1885 3540,2040
  region net PHASEB: 3424.1,1850.17 3523.32,1986.73 3450,2040 3350.78,1903.43
  rectangle net BHS: 3568,2037 3646,2095
  region net BHS: 3615,2025 3834.95,2092.25 3808.65,2178.28 3588.7,2111.04
  rectangle net PHASEC: 3970,1885 4060,2040
  region net PHASEC: 3944.1,1850.17 4043.32,1986.73 3970,2040 3870.78,1903.43
  region net CHS: 4135,2025 4354.95,2092.25 4328.65,2178.28 4108.7,2111.04
  rectangle net CHS: 4087,2036 4163,2112
  rectangle net GND: 3050,2580 3130,2655
  rectangle net GND: 3570,2580 3650,2655
  rectangle net GND: 4090,2580 4170,2655
  rectangle net 12/24V_IN: 4470,1515 4710,2375
  region net 12/24V_MOTOR: 3090.29,1447.11 3111.98,1475.9 3061.7,1513.79 3040,1485
  rectangle net 12/24V_MOTOR: 3090.28,1447.11 3320,1485
  rectangle net 12/24V_MOTOR: 3040,1485 3320,1550
  region net 12/24V_MOTOR: 3835,1485 3798.06,1532.28 3750.42,1495.06 3787.36,1447.78
  rectangle net 12/24V_MOTOR: 3560,1447.78 3787.36,1485
  rectangle net 12/24V_MOTOR: 3560,1485 3835,1550
  rectangle net 12/24V_MOTOR: 4080,1450 4355,1550
Bottom Layer:
  region net PHASEB: 3409.06,1887.52 3476.47,1980.3 3452.41,1997.78 3385,1905
  rectangle net PHASEB: 3420,1900 3450,1950
  rectangle net PHASEC: 3940,1900 3970,1955
  rectangle net 12/24V_MOTOR: 4020,1165 4695,1490
  rectangle net GND: 3045,2490 4635,2665
  rectangle net CHS: 4085,1910.82 4170,2035.82
  rectangle net PHASEC: 3870,1885 4060,1904
  region net PHASEC: 3894.84,1885.96 3994.06,2022.52 3970,2040 3870.78,1903.43
  rectangle net PHASEC: 3970,1900 4060,2040
  region net PHASEC: 3929.06,1887.52 3994.74,1977.92 3970.68,1995.4 3905,1905
  rectangle net BHS: 3565,1910 3650,2037
  rectangle net PHASEB: 3350.78,1885 3540,1903.43
  rectangle net PHASEB: 3450,1900 3540,2040
  region net PHASEB: 3374.84,1885.96 3474.06,2022.52 3450,2040 3350.78,1903.43
  rectangle net AHS: 3050,1910 3130,2040
  rectangle net PHASEA: 2832,1885 3025,1904
  region net PHASEA: 2854.05,1887.39 2956.72,2023.63 2935,2040 2832.33,1903.75
  rectangle net PHASEA: 2935,1900 3025,2040
  region net PHASEA: 2886.76,1888.61 2956.58,1981.27 2934.83,1997.67 2865,1905
  rectangle net PHASEA: 2895,1900 2935,1955
  rectangle net 12/24V_MOTOR: 3040,1415 4355,1595
  rectangle net 12/24V_MOTOR: 3850,1325 4025,1420
  region net 12/24V_MOTOR: 4020,1165 4095,1294.9 3645.5,1554.42 3570.5,1424.52
  region net 12/24V_MOTOR: 4407.67,1437.67 4460,1490 4355,1595 4302.67,1542.67

## Silkscreen, mask and mechanical layers (free items; w line width, h text height)
Top Overlay:
  text "Andy Yiu" at 2230,2640 h40
  text "9-2018" at 2230,2585 h30
Top Solder:
  region: 3275.82,1050.56 3381.14,1190.32 2937.32,1524.76 2832,1385
  rectangle: 3350,1310 3525,1904
  region: 4040,1395 3932.26,1532.9 3494.29,1190.72 3602.03,1052.82
  rectangle: 2832,1385 3007,1904
  rectangle: 3350,1310 3525,1904
  rectangle: 3870,1395 4045,1904
  region: 2905.47,1848.63 3008.15,1984.88 2935,2040 2832.33,1903.75
  rectangle: 2935,1885 3025,2040
  region: 3095.05,2027.75 3315,2095 3288.7,2181.04 3068.75,2113.79
  rectangle: 3050,2035 3130,2095
  rectangle: 3450,1885 3540,2040
  region: 3424.1,1850.17 3523.32,1986.73 3450,2040 3350.78,1903.43
  rectangle: 3568,2037 3646,2095
  region: 3615,2025 3834.95,2092.25 3808.65,2178.28 3588.7,2111.04
  rectangle: 3970,1885 4060,2040
  region: 3944.1,1850.17 4043.32,1986.73 3970,2040 3870.78,1903.43
  region: 4135,2025 4354.95,2092.25 4328.65,2178.28 4108.7,2111.04
  rectangle: 4087,2036 4163,2112
  rectangle: 3050,2580 3130,2655
  rectangle: 3570,2580 3650,2655
  rectangle: 4090,2580 4170,2655
  rectangle: 4470,1515 4710,2375
  region: 3090.29,1447.11 3111.98,1475.9 3061.7,1513.79 3040,1485
  rectangle: 3090.28,1447.11 3320,1485
  rectangle: 3040,1485 3320,1550
  region: 3835,1485 3798.06,1532.28 3750.42,1495.06 3787.36,1447.78
  rectangle: 3560,1447.78 3787.36,1485
  rectangle: 3560,1485 3835,1550
  rectangle: 4080,1450 4355,1550
Bottom Solder:
  rectangle: 4020,1165 4695,1490
  rectangle: 3045,2490 4635,2665
  rectangle: 4085,1910 4170,2035
  rectangle: 3870,1885 4060,1904
  region: 3894.84,1885.96 3994.06,2022.52 3970,2040 3870.78,1903.43
  rectangle: 3970,1900 4060,2040
  region: 3929.06,1887.52 3994.74,1977.92 3970.68,1995.4 3905,1905
  rectangle: 3565,1910 3650,2037
  rectangle: 3350.78,1885 3540,1903.43
  rectangle: 3450,1900 3540,2040
  region: 3374.84,1885.96 3474.06,2022.52 3450,2040 3350.78,1903.43
  region: 3409.06,1887.52 3476.47,1980.3 3452.41,1997.78 3385,1905
  rectangle: 3050,1910 3130,2040
  rectangle: 2832,1885 3025,1904
  region: 2854.05,1887.39 2956.72,2023.63 2935,2040 2832.33,1903.75
  rectangle: 2935,1900 3025,2040
  region: 2886.76,1888.61 2956.58,1981.27 2934.83,1997.67 2865,1905
  rectangle: 2895,1900 2935,1955
  rectangle: 3040,1415 4355,1595
  region: 4020,1165 4095,1294.9 3645.5,1554.42 3570.5,1424.52
  rectangle: 3850,1325 4025,1420
  region: 4407.67,1437.67 4460,1490 4355,1595 4302.67,1542.67
Mechanical 1:
  lines w10: 1000,2870 1000,1000 4750,1000 4750,2875 1005.58,2875

## Text inside footprints (layer, text, board x,y; h text height)
JP1: Top Overlay "+" at 4617,2186 h60 r90; Top Overlay "-" at 4707,2630 h60 r90